# Altium PCB buck_boost.PcbDoc
Units mil, origin at the board's own origin, x right, y up, seen from the top; angles counter-clockwise.
Board outline 4000 x 2500 mil, 2 copper layers (Top Layer, Bottom Layer); 49 components, 22 nets, 137 pads, 0 vias.
Unrouted connection lines stored in the file: 54.
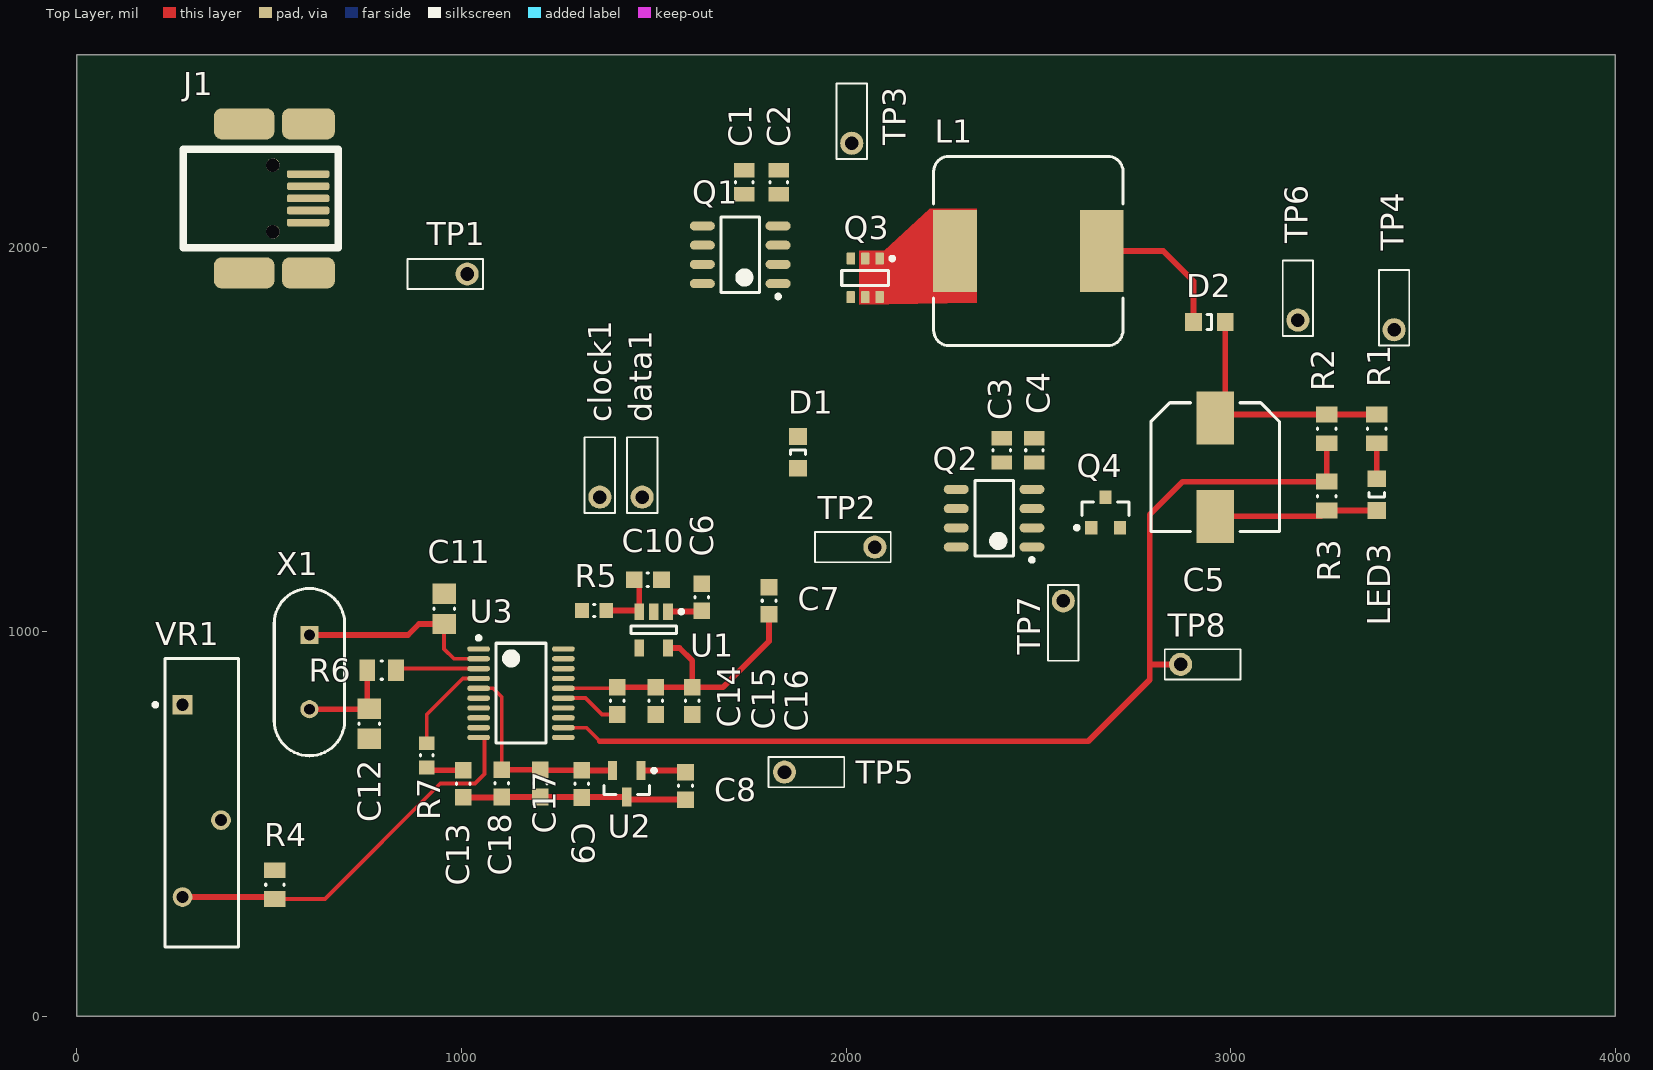
[diagram p0: Top Layer view]
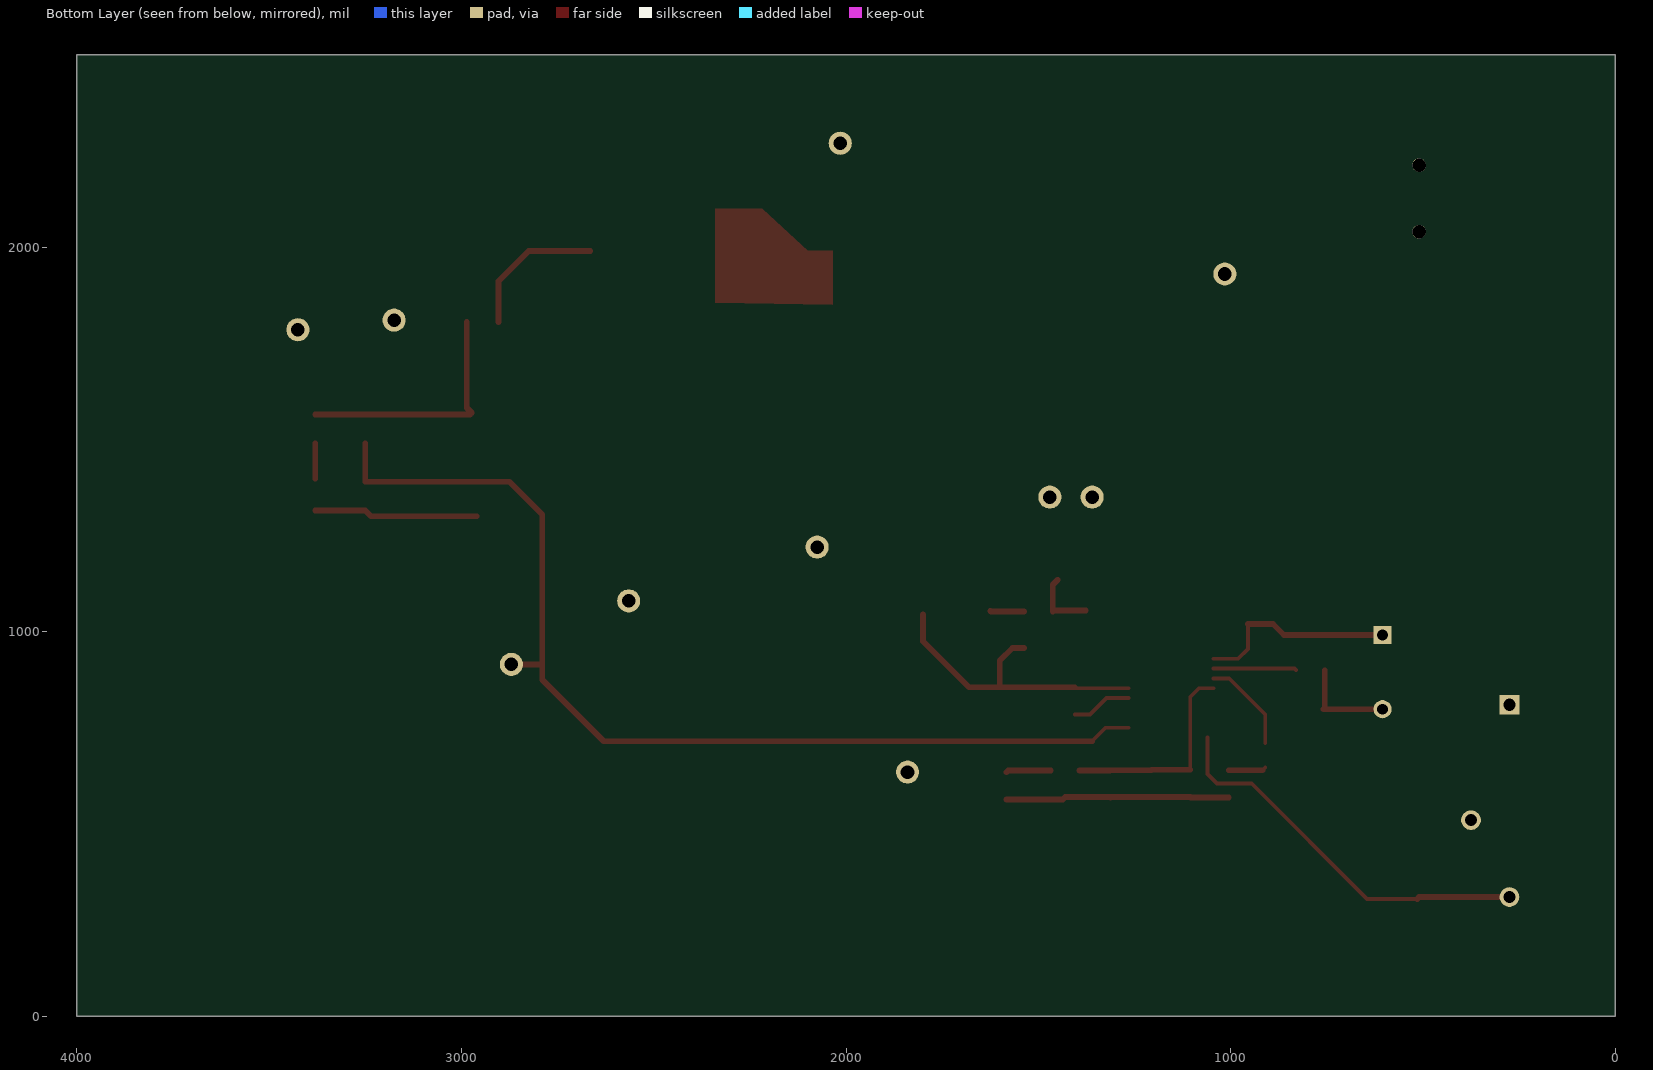
[diagram p1: Bottom Layer view, seen from below]

## Layer stack, top to bottom
Top Solder: solder mask 0.4, Solder Resist, Dk 3.5
Top Layer: signal copper 1.4
Dielectric 1: dielectric 12.6, FR-4, Dk 4.8
Bottom Layer: signal copper 1.4
Bottom Solder: solder mask 0.4, Solder Resist, Dk 3.5

## Board outline
0,0 4000,0 4000,2500 0,2500

## Design rules (kind name [scope] priority, off if disabled: settings)
Clearance [All] p1: gap=10 ignorepadtopadclearanceinfootprint=FALSE except(0: Arc-Hole Track-Hole SMDPad-Hole THPad-Hole Via-Hole Fill-Hole Poly-Hole Region-Hole Text-Hole; 8: Arc-SMDPad Arc-THPad Track-SMDPad Track-THPad)
PolygonConnect [All] p1: connectstyle=Relief reliefconductorwidth=10 reliefentries=4 polygonreliefangle="90 Angle" airgapwidth=10
RoutingVias [All] p1: holewidth=28 width=50 viastyle="Through Hole" minholewidth=28 minwidth=50 maxholewidth=28 maxwidth=50
SolderMaskExpansion [All] p1: expansion=4
Width [All] p1: maxlimit=15 minlimit=10 preferedwidth=15
30 further rules are at their usual default settings.

## Classes and differential pairs
component class buck_boost_schematic: C1 C2 C3 C4 C5 D1 D2 L1 LED3 Q1 Q2 Q3 Q4 R1 R2 R3 TP1 TP2 TP3 TP4 TP5 TP6 TP7 TP8
component class control_and_power: C6 C7 C8 C9 C10 C11 C12 C13 C14 C15 C16 C17 C18 clock1 data1 J1 R4 R5 R6 R7 U1 U2 U3 VR1 X1

## Components (designator, comment, footprint, x,y, rotation, side; value= is the part's Value field where it differs from the comment)
C1 "CAP 100nF 0805(2012)" CAPC0805(2012)100_L 1735,2168.5 r90 top value=220nF
C2 "CAP 100nF 0805(2012)" CAPC0805(2012)100_L 1825,2168.5 r90 top value=220nF
C3 "CAP 100nF 0805(2012)" CAPC0805(2012)100_L 2405,1471.5 r90 top value=220nF
C4 "CAP 100nF 0805(2012)" CAPC0805(2012)100_L 2490,1471.5 r90 top value=220nF
C5 "UUD1E221MNL1GS" NIC-CAPA2-8X10_V 2960,1427.95 r270 top
C6 "100nF 0603" CAPC0603(1608)100_M 1625,1089.57 r270 top value=1uF
C7 "CAP 1uF 25V 0603(1608)" CAPC0603(1608)100_M 1800,1080.43 r270 top value=1uF
C8 "100nF 0603" CAPC0603(1608)100_M 1582.6,598.9 r90 top value=1uF
C9 "CAP 1uF 25V 0603(1608)" CAPC0603(1608)100_M 1312.6,604.33 r90 top value=1uF
C10 "1uF 0603" CAPC0603(1608)100_M 1485,1135 r180 top value=1uF
C11 "CAP 18pF 100V 0805(2012)" CAPC0805(2012)145_M 955,1059.37 r90 top value=18pF
C12 "CAP 18pF 100V 0805(2012)" CAPC0805(2012)145_M 760,760.63 r270 top value=18pF
C13 "100nF 0603" CAPC0603(1608)100_M 1005,604.57 r90 top value=1uF
C14 "1uF 0603" CAPC0603(1608)100_M 1405,820 r90 top value=1uF
C15 "100nF 0603" CAPC0603(1608)100_M 1505,820 r90 top value=1uF
C16 "4.7nF 0603" CAPC0603(1608)100_M 1600,820 r90 top value=1uF
C17 "1uF 0603" CAPC0603(1608)100_M 1205,605.43 r90 top value=1uF
C18 "1uF 0603" CAPC0603(1608)100_M 1105,605.43 r90 top value=1uF
clock1 "TP-TH-C-152-H90" TP-TH-C-152-H90 1360,1350 r90 top
D1 "DIODE 0805" 0805_A 1875,1466.34 r270 top
D2 "DIODE 0805" 0805_A 2945,1805 r180 top
data1 "TP-TH-C-152-H90" TP-TH-C-152-H90 1470,1350 r90 top
J1 "67503-1020" MOLX-67503-1020_V 601.53,2189.61 r0 top
L1 "SRR1260-150M" BOUR-SRR1260_V 2474.06,1990 r0 top
LED3 "150080BS75000" 0805_A 3380,1356.34 r90 top
Q1 "STSR30 Driver" NXP-SOT96-1_L 1725,1980 r180 top
Q2 "STSR30 Driver" NXP-SOT96-1_L 2385,1295 r180 top
Q3 "RRQ045P03TR" DDC0006A_L 2050,1920 r270 top
Q4 "IRLML2402TRPBF" INTR-IRLML2402TRPBF-3_V 2675,1310 r90 top
R1 "390R 5% 0805(2012)" RESC0805(2012)_N 3380,1527.4 r90 top value="390.00 Ohm"
R2 "390R 5% 0805(2012)" RESC0805(2012)_N 3250,1527.4 r90 top value="390.00 Ohm"
R3 "390R 5% 0805(2012)" RESC0805(2012)_N 3250,1352.6 r90 top value="390.00 Ohm"
R4 "1K 0805(2012) (NEED TO BE 0805 Wide)" RESC0805(2012)_N 515,342.4 r90 top value="30.00 Ohm"
R5 "100K" RESC0603(1608)_N 1345,1055 r0 top
R6 "1M 1% 0805(2012)" RESC0805(2012)_N 792.6,900 r180 top value="1000000.00 Ohm"
R7 "1K 0603" RESC0603(1608)_N 910,678.5 r270 top value=1K
TP1 "TP-TH-C-152-H90" TP-TH-C-152-H90 1015,1930 r180 top
TP2 "TP-TH-C-152-H90" TP-TH-C-152-H90 2075,1220 r180 top
TP3 "TP-TH-C-152-H90" TP-TH-C-152-H90 2015,2270 r90 top
TP4 "TP-TH-C-152-H90" TP-TH-C-152-H90 3425,1785 r90 top
TP5 "TP-TH-C-152-H90" TP-TH-C-152-H90 1840,635 r0 top
TP6 "TP-TH-C-152-H90" TP-TH-C-152-H90 3175,1810 r90 top
TP7 "TP-TH-C-152-H90" TP-TH-C-152-H90 2565,1080 r270 top
TP8 "TP-TH-C-152-H90" TP-TH-C-152-H90 2870,915 r0 top
U1 "NCP114" SOT23-5_N 1500,1005 r270 top
U2 "REF3033" SOT23-3 1430,604.45 r270 top
U3 "STM32F030F4P6" STM-TSSOP20_L 1155,840 r0 top
VR1 "3006P-7-502ZLF" BOUR-3006P-3_V 325,555.08 r270 top
X1 "HC-49US 8MHz" JPY-HC-49US 605,895 r270 top

## Footprints (in the part's own frame and the unit in brackets; to place one, negate y for a bottom-side part, rotate by r counter-clockwise, add the part's x,y. Pads: shape width x height; smd on the part's side, far side on the other; paste and mask are expansions set on the pad)
0805_A [mm] "Chip LED, 2-Leads, Body 2.0x1.3mm, IPC Medium Density"
  rect 1.1x1.2 smd: 1(-1.05,0) 2(1.05,0)
  silkscreen extent -0.15,-0.5 0.15,0.5, body extent -1,-0.62 1,0.63, height 0.68
BOUR-3006P-3_V [mm] "THD, 3-Leads, Body 19.05x4.83mm, Height 6.6mm"
  rect 1.3x1.3 hole 0.8: 1(-6.475,-1.27)
  round 1.3 hole 0.8: 2(1.145,1.27) 3(6.225,-1.27)
  silkscreen extent -9.53,-3.19 9.53,2.41, body extent -9.53,-2.41 11.05,2.41, height 6.6
BOUR-SRR1260_V [mm] "SMD, 2-Leads, Body 12.5x12.5mm"
  rect 2.9x5.4 smd: 1(-4.85,0) 2(4.85,0)
  silkscreen extent -6.25,-6.25 6.25,6.25, body extent -6.25,-6.25 6.25,6.25, height 7.51
CAPC0603(1608)100_M [mm] "Chip Capacitor, Body 1.6x0.8mm, Height 1.0mm, IPC Low Density"
  rect 1.1x1.1 smd: 1(-0.9,0) 2(0.9,0)
  silkscreen extent -0.05,-0.45 0.05,0.45, body extent -0.87,-0.47 0.88,0.48, height 1
CAPC0805(2012)100_L [mm] "Chip Capacitor, Body 2.0x1.2mm, Height 1.0mm, IPC High Density"
  rect 0.95x1.35 smd: 1(-0.8,0) 2(0.8,0)
  silkscreen extent -0.05,-0.58 0.05,0.58, body extent -1.1,-0.72 1.1,0.72, height 1
CAPC0805(2012)145_M [mm] "Chip Capacitor, Body 2.0x1.2mm, Height 1.45mm, IPC Low Density"
  rect 1.35x1.55 smd: 1(-1,0) 2(1,0)
  silkscreen extent -0.05,-0.67 0.05,0.67, body extent -1.1,-0.72 1.1,0.72, height 1.45
DDC0006A_L [mm] "SOT23, 6-Leads, Body 3.05x1.75mm, Pitch 0.95mm, IPC High Density"
  rrect18% 0.8x0.55 smd: 1(-1.275,0.95) 2(-1.275,0) 3(-1.275,-0.95) 4(1.275,-0.95) 5(1.275,0) 6(1.275,0.95)
  silkscreen extent -1.4,-1.55 0.5,1.9, body extent -1.43,-1.48 1.43,1.49, height 0.9
INTR-IRLML2402TRPBF-3_V [mm] "SOT23, 3-Leads, Body 3.05x1.4mm, Pitch 0.95mm"
  rect 0.9x0.8 smd: 1(-1,0.95) 2(-1,-0.95) 3(1,0)
  silkscreen extent -1.12,-1.55 0.7,2.02, body extent -0.7,-1.52 0.7,1.53, height 1.11
JPY-HC-49US [mm] "THD, 2-Leads, Body 11.05x4.65mm, Pitch 4.9mm"
  rect 1.2x1.2 hole 0.7: 1(-2.45,0)
  round 1.2 hole 0.7: 2(2.45,0)
  silkscreen extent -5.53,-2.32 5.53,2.32, body extent -5.53,-2.33 5.52,2.32, height 3.5
MOLX-67503-1020_V [mm] "Mini USB Connector, SMT, Righer Angle"
  rrect50% 2.8x0.5 smd: 1(0,0) 2(0,-0.8) 3(0,-1.6) 4(0,-2.4) 5(0,-3.2)
  rrect50% 3.5x2.05 smd: 6(0.025,3.325) 8(0.025,-6.525)
  rrect50% 4x2.05 smd: 7(-4.225,3.325) 9(-4.225,-6.525)
  round 0.9 hole 0.9 unplated: X(-2.325,-3.8) Y(-2.325,0.6)
  silkscreen extent -8.25,-4.85 2,1.65, body extent -8.22,-6.56 0.78,3.34, height 3.95
NIC-CAPA2-8X10_V [mm] "Aluminum Electrolytic Capacitor, Diameter 8mm, Height 10.8mm, Pitch 6.5mm"
  rect 3.5x2.5 smd: 1(-3.25,0) 2(3.25,0)
  silkscreen extent -4.25,-4.25 4.25,4.25, body extent -3.99,-3.97 3.99,4, height 10.8
NXP-SOT96-1_L [mm] "SOIC, 8-Leads, Body 5x4mm, Pitch 1.27mm, IPC High Density"
  oval 1.65x0.6 smd: 1(-2.5,1.905) 2(-2.5,0.635) 3(-2.5,-0.635) 4(-2.5,-1.905) 5(2.5,-1.905) 6(2.5,-0.635) 7(2.5,0.635) 8(2.5,1.905)
  silkscreen extent -2.63,-2.5 1.27,2.88, body extent -2,-2.5 2,2.5, height 1.75
RESC0603(1608)_N [mm] "Chip Resistor, Body 1.6x0.8mm, IPC Medium Density"
  rect 0.9x1 smd: 1(-0.8,0) 2(0.8,0)
  silkscreen extent -0.05,-0.4 0.05,0.4, body extent -0.85,-0.47 0.85,0.47, height 0.6
RESC0805(2012)_N [mm] "Chip Resistor, Body 2.0x1.3mm, IPC Medium Density"
  rect 1.05x1.4 smd: 1(-0.95,0) 2(0.95,0)
  silkscreen extent -0.05,-0.6 0.05,0.6, body extent -1.1,-0.67 1.1,0.68, height 0.7
SOT23-3 [mm] "SOT23, 3-Leads, Body 3.04x1.4mm, Pitch 0.96mm, IPC High Density"
  rect 1.25x0.6 smd: 1(-0.875,0.95) 2(-0.875,-0.95) 3(0.875,0)
  silkscreen extent -1,-1.5 0.7,1.93, body extent -0.7,-1.52 0.7,1.52, height 1.12
SOT23-5_N [mm] "SOT23, 5-Leads, Body 2.9x1.6mm, Pitch 0.95mm, Lead Span 2.8mm, IPC Medium Density"
  rect 1.1x0.65 smd: 1(-1.2,0.95) 2(-1.2,0) 3(-1.2,-0.95) 4(1.2,-0.95) 5(1.2,0.95)
  silkscreen extent -1.32,-1.5 0.25,1.95, body extent -0.87,-1.5 0.87,1.5, height 1.45
STM-TSSOP20_L [mm] "SOP, 20-Leads, Body 6.6x4.5mm, Pitch 0.65mm, IPC High Density"
  oval 1.5x0.35 smd: 1(-2.8,2.925) 2(-2.8,2.275) 3(-2.8,1.625) 4(-2.8,0.975) 5(-2.8,0.325) 6(-2.8,-0.325) 7(-2.8,-0.975) 8(-2.8,-1.625) 9(-2.8,-2.275) 10(-2.8,-2.925) 11(2.8,-2.925) 12(2.8,-2.275) 13(2.8,-1.625) 14(2.8,-0.975) 15(2.8,-0.325) 16(2.8,0.325) 17(2.8,0.975) 18(2.8,1.625) 19(2.8,2.275) 20(2.8,2.925)
  silkscreen extent -2.92,-3.3 1.65,3.77, body extent -2.25,-3.3 2.25,3.3, height 1.2
TP-TH-C-152-H90 [mil] "Test Point, Through Hole, Hole Size 0.9mm, PCB Mount with Silkscreen Box"
  round 60 hole 35.43: 1(0,0)
  silkscreen extent -41,-39 156,39

## Part data
C1 C2 C3 C4: library part CMP-1036-04519-1, "CAP 220nF 6.3V ±10% 0805 (2012 Metric) Thickness 1mm SMD", Case-EIA=0805, Case-Metric=2012, Rated Voltage="6.3 V", Tolerance=±10%, Max Thickness="1 mm", Technology=SMT
C5: library part CMP-0687-00079-1, "Aluminum Electrolytic Capacitor, UD Series, Low Impedance, 220 uF, 25 V, + / - 20%, -55 to 105 degC, Chip Type, 8 x 10 mm D x L, Pb-Free, Reel", Manufacturer=Nichicon, Rated Capacitance="220 uF", Rated Ripple Current (at 100kHz)="450 mA", Rated Voltage="25 V", Tolerance Rated Capacitance="-20 to 20%", ComponentLink1Description="Manufacturer URL", ComponentLink1URL=http://www.nichicon.co.jp/, ComponentLink2Description=Datasheet, ComponentLink2URL=http://products.nichicon.co.jp/en/pdf/XJA043/e-ud.pdf, ComponentLink3Description="Package Specification", ComponentLink3URL=http://products.nichicon.co.jp/en/pdf/XJA043/e-ud.pdf, DatasheetVersion=08/2012, Diameter="8 mm", Endurance Time="5000 h", Impedance="0.17 Ohm", Length="10 mm", Mounting Technology="Surface Mount", PackageDescription="2-Pin Surface Mount Device, Diameter 8 mm, Height 10 mm, Pitch 6.5 mm", PackageReference=CAPAE-D8H10, Packing="Dia382mm Reel", PartNumber=UUD1E221MNL1GS, RoHS=TRUE
C6 C7 C8 C9 C10 C13 C14 C15 C16 C17 C18: library part CMP-1035-02742-1, "CAP 1uF 25V -20% to +80% 0603 (1608 Metric) Thickness 1mm SMD", Case-EIA=0603, Case-Metric=1608, Rated Voltage="25 V", Tolerance="-20% to +80%", Max Thickness="1 mm", Technology=SMT
C11 C12: library part CMP-1036-01160-1, "CAP 18pF 100V ±10% 0805 (2012 Metric) Thickness 1.45mm SMD", Case-EIA=0805, Case-Metric=2012, Rated Voltage="100 V", Tolerance=±10%, Max Thickness="1.45 mm", Technology=SMT
clock1 data1 TP1 TP2 TP3 TP4 TP5 TP6 TP7 TP8: library part CMP-0484-00003-2, "Test Point, Through Hole, Hole Size 0.9 mm, PCB Mount with Silkscreen Box", Manufacturer="No Vendor", PartNumber=TP-TH-C-152-H90
D1 D2: library part CMP-1426-00008-1, "SMD mono-color Chip LED, WL-SMCW, Blue", Color=Blue, Manufacturer="Wuerth Elektronik", PartNumber=150080BS75000, ComponentLink1Description="Manufacturer URL", ComponentLink1URL=http://www.we-online.com, ComponentLink2Description=Datasheet, ComponentLink2URL=http://katalog.we-online.com/led/datasheet/150080BS75000.pdf, PackageReference=0805_A
J1: library part CMP-0411-00002-1, "USB, MINI, SMD, RA KME04-USBMU03A01", Manufacturer=Molex, ComponentLink1Description="Manufacturer URL", ComponentLink1URL=http://www.molex.com/, ComponentLink2Description=Datasheet, ComponentLink2URL=http://www.molex.com/pdm_docs/sd/675031020_sd.pdf, DatasheetVersion="Rev F, 06/2009", Mounting Technology="Surface Mount", PackageDescription="Mini USB Connector, SMT, Righer Angle", PackageReference=67503-1020, PartNumber=67503-1020, Terminal Pitch="0.8 mm"
L1: library part CMP-2000-07146-1, "Shielded Power Inductor, 15 uH, +/- 20%, -40 to 125 degC, 2-Pin SMD, RoHS, Tape and Reel", Inductance=15uH, Manufacturer=Bourns, Maximum DC Current=5A, Maximum DC Resistance=27mOhm, Package/Case=12.8X12.8X6.5, Package Description="2-Pin Surface Mount Device, Body 12.5 x 12.5 mm", Package Reference=SRR1260, Tolerance=20%, Category=InductorSurfaceMount, Core Material=Ferrite, Datasheet URL=http://www.bourns.com/docs/Product-Datasheets/SRR1260.pdf, Datasheet Version=03/2015, Manufacturer URL=http://www.bourns.com/, Minimum Quality Factor=25(Typ)@2.52MHz, Mounting Technology=SurfaceMount, Product Height=6.5mm, Type=Power
LED3: library part CMP-1426-00008-1, "SMD mono-color Chip LED, WL-SMCW, Blue", Color=Blue, Manufacturer="Wuerth Elektronik", ComponentLink1Description="Manufacturer URL", ComponentLink1URL=http://www.we-online.com, ComponentLink2Description=Datasheet, ComponentLink2URL=http://katalog.we-online.com/led/datasheet/150080BS75000.pdf, PackageReference=0805_A, PartNumber=150080BS75000
Q1 Q2: library part STSR30
Q3: library part "MOSFET_P - RRQ045P03TR"
Q4: library part CMP-2000-05155-1, "HEXFET(R) Power MOSFET, N-Channel, 20 V, 1.2 A, 3-Pin SOT-23, RoHS, Tape and Reel", Continuous Drain Current Id=1.2A, Current Temperature=25degC, Drain Source Voltage Vds=20V, Junction Temperature Tj Min=-55degC, Manufacturer="International Rectifier", On Resistance Rds(on)=250mohm, Operating Temperature Range=-55degCto+150degC, Package / Case=SOT-23, Power Dissipation Pd=540mW, Pulse Current Idm=7.4A, Rds(on) Test Voltage Vgs=4.5V, Threshold Voltage Vgs Typ=700mV, Current Id Max=1.2A, Datasheet URL=https://datasheet.ciiva.com/29326/162826-da-01-en-irlml-2402tr-29326791.pdf, Datasheet Version=Jan-03, External Depth=2.5mm, External Length / Height=1.12mm, External Width=3.05mm, Full Power Rating Temperature=25degC, Manufacturer URL=http://internationalrectifier.com/, No. of Pins=3, No. of Transistors=1, Reel Quantity=3000, SMD Marking=1A, SVHC=NoSVHC(19-Dec-2012), Tape Width=8mm, Termination Type=SMD, Transistor Case Style=SOT-23, Transistor Polarity=NChannel, Voltage Vds Typ=20V, Voltage Vgs Max=700mV, Voltage Vgs Rds on Measurement=4.5V, Voltage Vgs th Min=700mV
R1 R2 R3: library part CMP-1013-00064-1, "390R 0.125W 5% 0805 (2012 Metric)  SMD", Case-EIA=0805, Case-Metric=2012, Power="0.125 W", Tolerance="5 %", Technology=SMT
R4: library part CMP-1013-00037-1, "30R 0.125W 5% 0805 (2012 Metric)  SMD", Case-EIA=0805, Case-Metric=2012, Power="0.125 W", Tolerance="5 %", Technology=SMT
R5 R7: library part CMP-1012-00542-1, "2K 0.1W 1% 0603 (1608 Metric)  SMD", Case-EIA=0603, Case-Metric=1608, Power="0.1 W", Tolerance="1 %", Technology=SMT
R6: library part CMP-1013-00849-1, "1M 0.125W 1% 0805 (2012 Metric)  SMD", Case-EIA=0805, Case-Metric=2012, Power="0.125 W", Tolerance="1 %", Technology=SMT
U3: library part CMP-0304-00039-2, "ARM Cortex-M0 32-bit MCU, 16 KB Flash, 4 KB Internal RAM, 15 I/Os, 20-pin TSSOP, -40 to 85 degC, Tube", I/Os (High Current)=15, Operating Frequency(F) (Processor speed) (MHz)=48, Supply Voltage(Vcc) min (V)=2.4, ComponentLink1Description="Manufacturer URL", ComponentLink1URL=http://www.st.com/web/en/home.html, ComponentLink2Description=Datasheet, ComponentLink2URL=http://www.st.com/st-web-ui/static/active/en/resource/technical/document/datasheet/DM00088500.pdf, ComponentLink3Description="Package Specification", ComponentLink3URL=http://www.st.com/st-web-ui/static/active/en/resource/technical/document/datasheet/DM00065136.pdf, Core="ARM Cortex-M0", DatasheetVersion="Rev. 1", FLASH Size (Prog) (kB)=16, Internal RAM Size (kB)=4, Mounting Technology="Surface Mount", PackageDescription="20-Pin Thin Shrink Small Outline Package, 6.5 x 4.4 mm Body, 0.65 mm Pitch", PackageReference=TSSOP20, PackageVersion="Rev. 1, 11/2012", Packing=Tube, PartNumber=STM32F030F4P6
VR1: library part CMP-0972-00009-1, "Trimming Potentiometer, 5K Ohm +/- 10%, -55 to 125 degC, 3-Pin 19.05 x 4.83 x 6.6 mm THD, Transparent Housing, RoHS", Manufacturer=Bourns, Resistance (kOhm)=5, Resistance Tolerance="+/- 10%", Temperature Range="-55 to 125 degC", ComponentLink1Description="Manufacturer URL", ComponentLink1URL=http://www.bourns.com/, ComponentLink2Description=Datasheet, ComponentLink2URL=http://www.bourns.com/data/global/pdfs/3006.pdf, ComponentLink3Description="Package Specification", ComponentLink3URL=http://www.bourns.com/data/global/pdfs/3006.pdf, DatasheetVersion=Apr-14, Mounting Technology="Through Hole", Number of Turns=15, PackageDescription="3-Pin THD, Body 19.05 x 4.83 mm, Height 6.6 mm", PackageReference=3006P-3, PackageVersion=Apr-14, PartNumber=3006P-7-502ZLF, RoHS=TRUE, Rotational Life="200 Cycles"
X1: library part CMP-2100-03645-1, "Crystal, 16 MHz, +/- 30 ppm, 18 pF, -20 to 70 degC, 2-Pin THD", Manufacturer="Jing peng yuan", Package Description="2-Pin Throug Hole Device, Body 11.05 x 4.65 mm, Pitch 4.9 mm", Package Reference=HC-49US, Datasheet URL=https://statics3.seeedstudio.com/images/opl/datasheet/306010014.pdf, Datasheet Version=42125.0

## Nets (pads, with @x,y where several pads share a name; then routed paths per layer and width w, separated by ;. In a path a pad name is that pad's centre, name@x,y a point inside that pad or via, vN(x,y) a via of type N, cw(c..) or ccw(c..) an arc to the next point about the centre after c; other vN are vias at no path point)
3V3: C7.2 C14.2 C15.2 C16.2 U1.5 U3.16 | length 801.1
  Top Layer w10: U3.16 1402.36,852.8 C14.2
  Top Layer w15: C14.2 C15.2 C16.2 ; U1.5 1567.24,957.76 1600,925 C16.2 ; C7.2 1800,975 1680.43,855.43 C16.2
3V3_REF: C9.2 C17.2 C18.2 R5.1 U2.2 U3.5 | length 547.2
  Top Layer w10: U3.5 1082.2,852.8 1105,830 C18.2
  Top Layer w15: C18.2 C17.2 1206.1,639.76 C9.2 1313.46,638.9 U2.2
5V: C1.2 C2.2 C3.2 C4.2 C6.2 C8.2 J1.1 Q1.5 Q1.6 Q2.5 Q2.6 Q3.4 R4.2 TP5.1 U1.1 U2.1 | length 205.5
  Top Layer w15: U2.1 1578.03,638.9 C8.2 ; U1.1 1623.11,1052.24 C6.2
GND: C1.1 C2.1 C3.1 C4.1 C5.2 C6.1 C7.1 C8.1 C9.1 C10.1 C11.2 C12.2 C13.1 C14.1 C15.1 C16.1 C17.1 C18.1 D1.2 J1.5 LED3.1 Q1.1 Q1.3 Q1.4 Q1.7 Q2.1 Q2.3 Q2.4 Q2.7 Q4.2 R3.1 U1.2 U2.3 U3.15 VR1.2 | length 1165.4
  Top Layer w10: C18.1@1104.13,569.13 C18.1 ; U3.15 1322.8,827.2 1365.43,784.57 C14.1
  Top Layer w15: C13.1 C18.1@1104.13,569.13 ; C18.1 C17.1 1311.5,570 C9.1 1313.7,570 U2.3 1436.54,563.46 C8.1 ; C5.2 3234.8,1300 R3.1 3250.2,1315 LED3.1
NetC5_1: C5.1 D2.1 R1.2 R2.2 TP4.1 | length 650
  Top Layer w15: D2.1 2986.34,1582.24 2973.17,1569.07 2977.44,1564.8 R2.2 R1.2
NetC10_2: C10.2 R5.2 U1.3 | length 175.4
  Top Layer w15: R5.2 1459.84,1055 U1.3 1462.6,1121.97 C10.2
NetC11_1: C11.1 U3.2 X1.1 | length 527.1
  Top Layer w10: C11.1 955,955 980.43,929.57 U3.2
  Top Layer w15: X1.1 861.46,991.46 890,1020 C11.1
NetC12_1: C12.1 R6.2 X1.2 | length 257.6
  Top Layer w10: C12.1@755.2,804.8 C12.1 C12.1@758.54,798.54
  Top Layer w15: X1.2 C12.1@758.54,798.54 ; C12.1@755.2,804.8 R6.2
NetC13_2: C13.2 R7.2 | length 97.9
  Top Layer w10: R7.2 R7.2@917.01,640
  Top Layer w15: R7.2@917.01,640 C13.2
Netclock1_1: clock1.1 U3.20
NetD1_1: D1.1 L1.1 Q3.1 Q3.2 Q3.5 Q3.6
NetD2_2: D2.2 L1.2 Q4.3 | length 377.6
  Top Layer w15: L1.2 2825,1990 2903.66,1911.34 D2.2
Netdata1_1: data1.1 U3.19
NetLED3_2: LED3.2 R1.1 TP6.1 | length 92.3
  Top Layer w15: LED3.2 R1.1
NetR6_1: R6.1 U3.3 | length 216.4
  Top Layer w10: R6.1 833.98,903.98 U3.3
NetR7_1: R7.1 U3.4 | length 248.4
  Top Layer w10: R7.1 910,785 1003.39,878.39 U3.4
POT_IN: R4.1 U3.10 VR1.3 | length 1016.7
  Top Layer w10: R4.1 645,305 945,605 1035,605 1060,630 U3.10@1060,725
  Top Layer w15: VR1.3 510,310 R4.1
PWM_SW1: Q1.8 TP1.1 U3.6
PWM_SW1_OUT: Q1.2 Q3.3 TP3.1
PWM_SW2: Q2.8 TP2.1 U3.8
PWM_SW2_OUT: Q2.2 Q4.1 TP7.1
VO_SENSE: R2.1 R3.2 TP8.1 U3.12 | length 2713
  Top Layer w10: U3.12 1324.57,750.43 1360,715
  Top Layer w15: 1360,715 2630,715 2790,875 2790,910 ; TP8.1 2795,915 2790,910 ; R2.1 R3.2 2875,1390 2790,1305 2790,910
pads on no net: J1.2 J1.3 J1.4 J1.6 J1.7 J1.8 J1.9 J1.X J1.Y U1.4 U3.1 U3.7 U3.9 U3.11 U3.13 U3.14 U3.17 U3.18 VR1.1

## Other copper
Top Layer:
  region net NetD1_1: 2035,1990 2100,1990 2217.2,2100 2225,2100 2340,2100 2340,1880 2340,1855 2035,1850

## Silkscreen, mask and mechanical layers (free items; w line width, h text height)
Mechanical 1:
  the board outline again, w10